# Altium PCB 6C-2L-1550um.PcbDoc
Units mm, origin at the board's own origin, x right, y up, seen from the top; angles counter-clockwise.
Board outline 96.52 x 44.45 mm, 2 copper layers (Top Layer, Bottom Layer), stack 1.586 mm thick; 62 components, 59 nets, 241 pads, 52 vias.
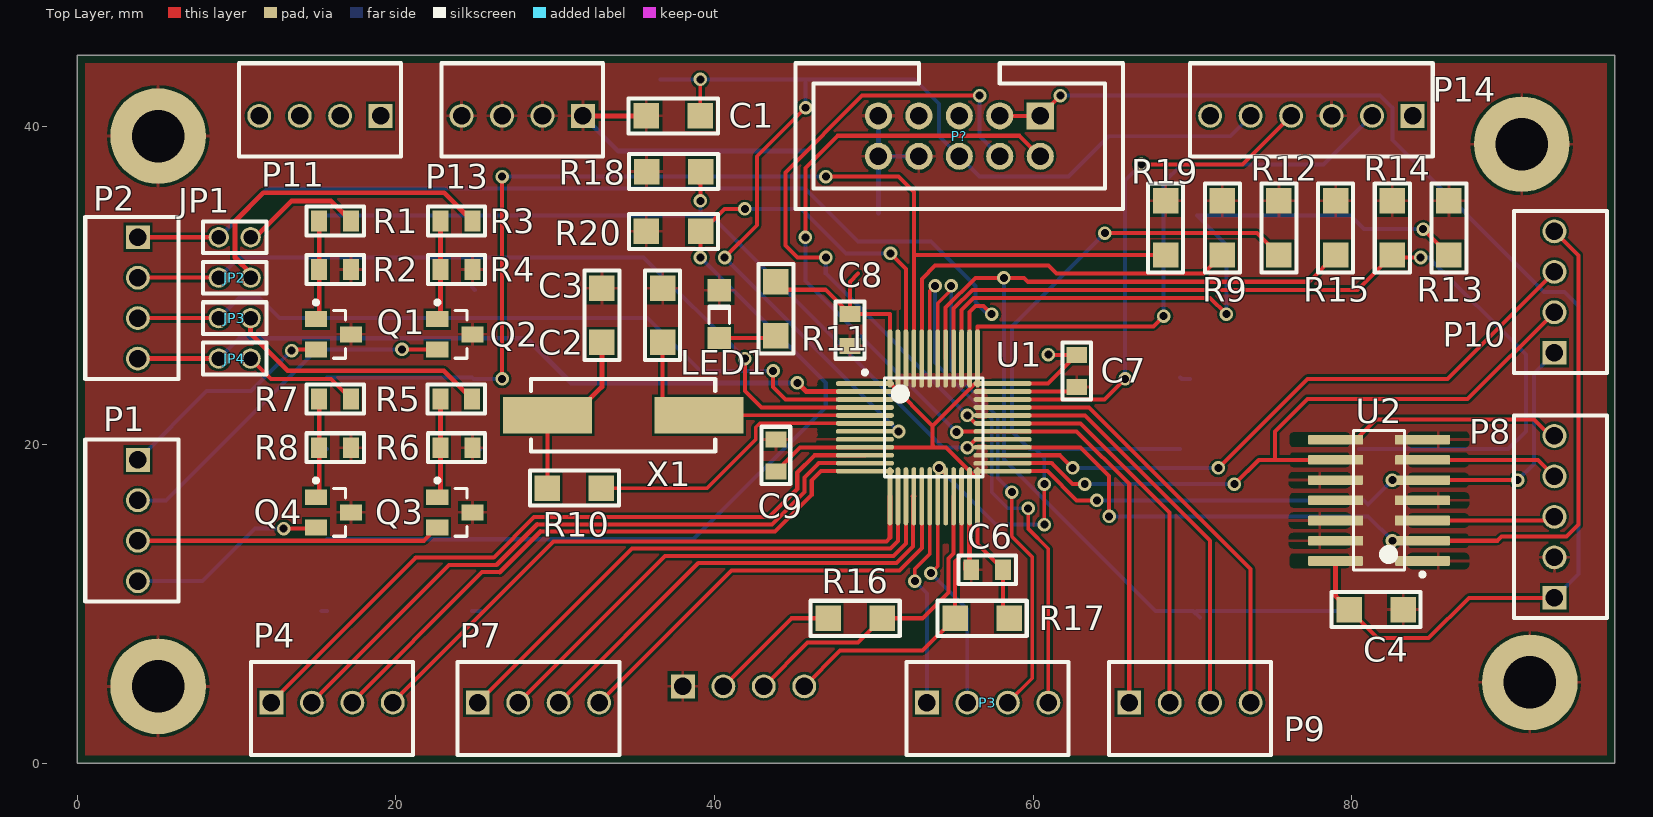
[diagram p0: Top Layer view]
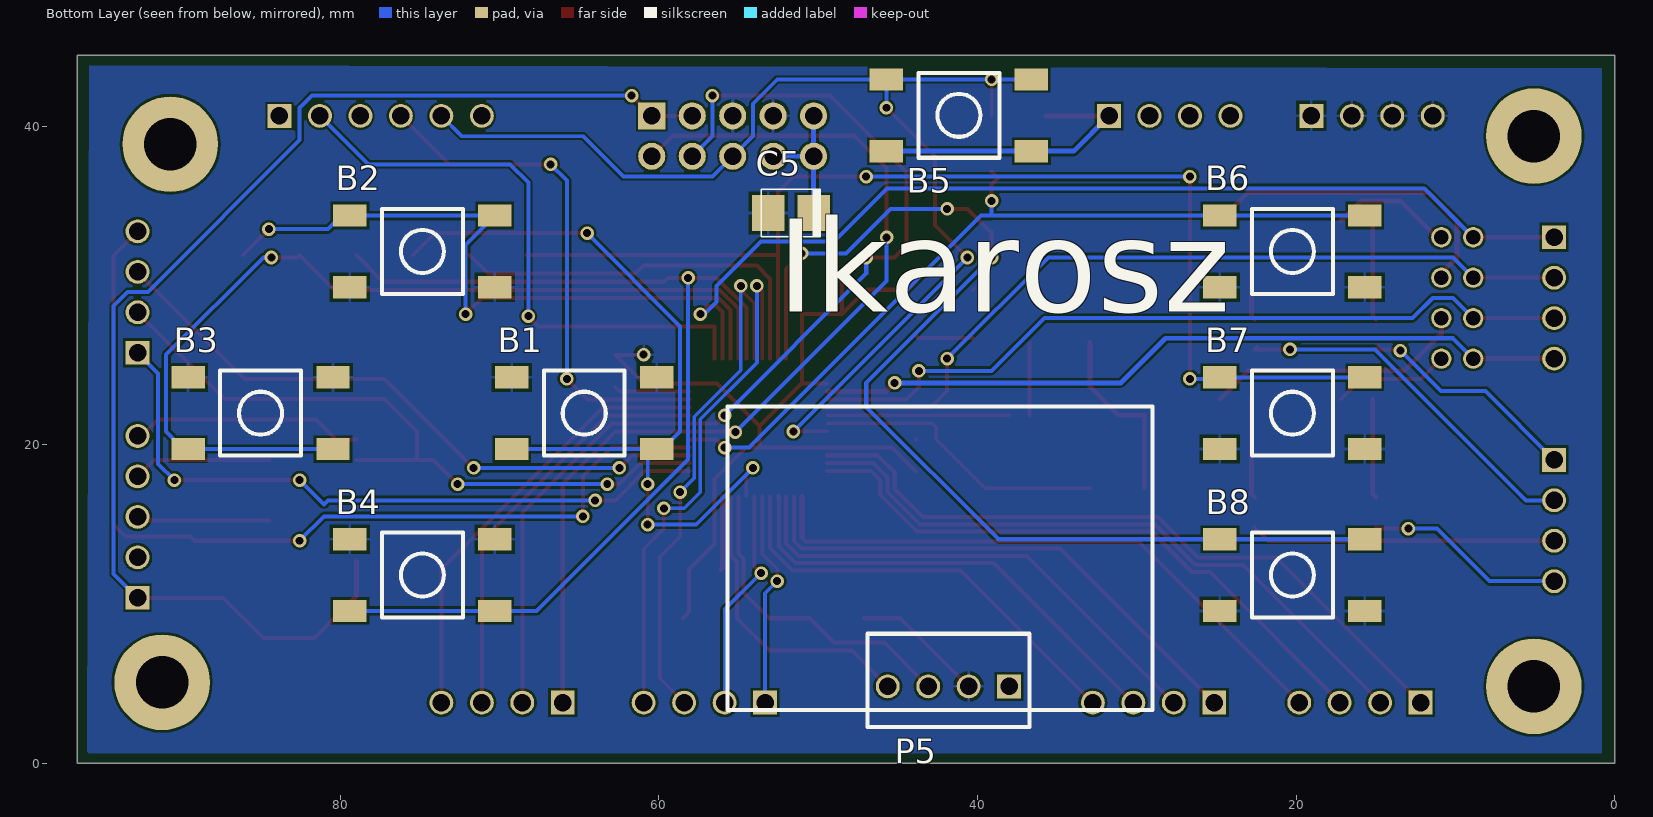
[diagram p1: Bottom Layer view, seen from below]
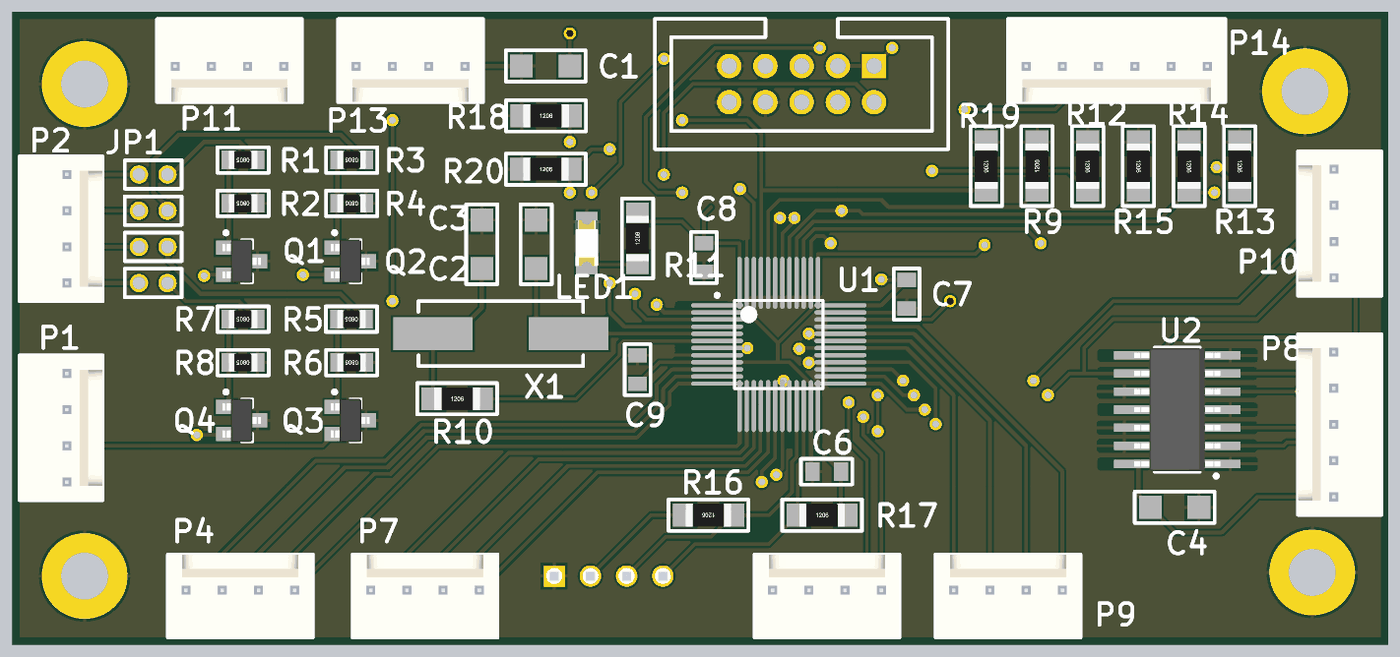
[diagram p2: 3D render of the assembled board from above, using the file's embedded part models]
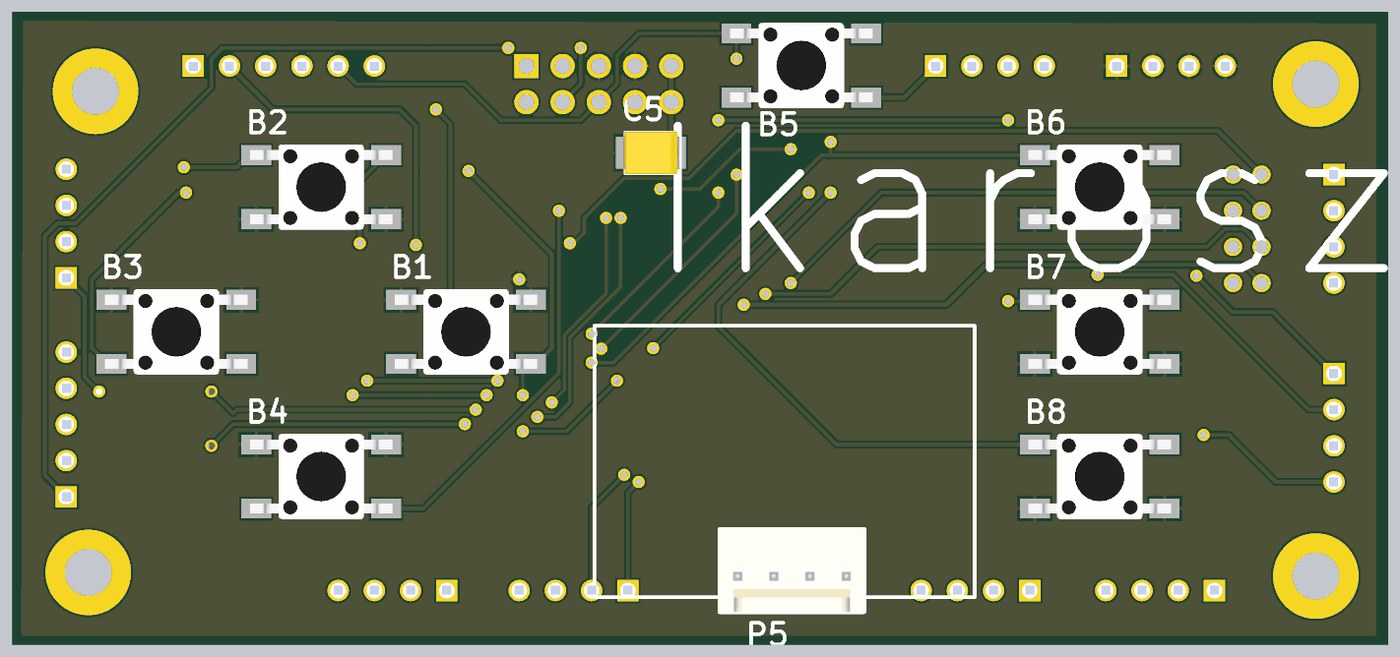
[diagram p3: 3D render of the assembled board from below, using the file's embedded part models]

## Layer stack, top to bottom
Top Solder: solder mask 0.0102, Solder Resist, Dk 3.5
Top Layer: signal copper 0.018
Dielectric1: core 1.55, FR-4, Dk 4.8
Bottom Layer: signal copper 0.018
Bottom Solder: solder mask 0.0102, Solder Resist, Dk 3.5

## Board outline
0,0 0,44.45 96.52,44.45 96.52,0

## Design rules (kind name [scope] priority, off if disabled: settings)
BoardOutlineClearance [All] p1: gap=0.25 ignorepadtopadclearanceinfootprint=FALSE except(0: Arc-SplitContinuation Track-SplitContinuation SMDPad-SplitContinuation THPad-SplitContinuation Via-SplitContinuation Fill-SplitContinuation Poly-SplitContinuation Region-SplitContinuation Text-SplitContinuation)
Clearance Clearance-xPP-xTP-xTT [All] p1: gap=0.15 ignorepadtopadclearanceinfootprint=FALSE except(0: Arc-Hole Track-Hole SMDPad-Hole THPad-Hole Via-Hole Fill-Hole Poly-Hole Region-Hole Text-Hole)
ComponentClearance [All] p1: gap=0.25 collisioncheckmode=3 verticalgap=0.25 showdistances=FALSE
DiffPairsRouting [All] p1: maxlimit=0.25 minlimit=0.25 mostfreqgap=0.25 toplayer_minwidth=0.381 toplayer_maxwidth=0.381 toplayer_prefwidth=0.381 bottomlayer_minwidth=0.381 bottomlayer_maxwidth=0.381 bottomlayer_prefwidth=0.381 maxuncoupledlength=12.5
Height [All] p1: minheight=0 maxheight=25 prefheight=12.5
HoleSize HoleSize-PTH [All] p1: absolutevalues=TRUE maxlimit=5 minlimit=0.25 maxpercent=80.000 minpercent=20.000
HoleToHoleClearance [All] p1: gap=0.35 allowstackedmicrovias=TRUE
MinimumAnnularRing "Minimum IAR  >0.45mm" [((ObjectKind = 'Pad') OR (ObjectKind = 'Via')) And (Layer = 'MultiLayer') And (HoleDiameter > AsMM(0.45))] p1: minimumring=0.175 // minimum inner annular ring for pads > 0.45mm finished hole size
MinimumAnnularRing "Minimum IAR <=0.45mm" [((ObjectKind = 'Pad') OR (ObjectKind = 'Via')) And (Layer = 'MultiLayer') And (HoleDiameter <= AsMM(0.45))] p2: minimumring=0.175 // minimum inner annular ring for pads <= 0.45mm finished hole size
MinimumSolderMaskSliver [All] p1: minsoldermaskwidth=0.08
PlaneClearance PlaneClearance-IPI [All] p1: clearance=0.25
PlaneConnect [All] p1: planeconnectstyle=Relief reliefexpansion=0.175 reliefentries=4 reliefconductorwidth=0.2 reliefairgap=0.2
PolygonConnect PolygonConnect-xTW [All] p1: connectstyle=Relief reliefconductorwidth=0.2 reliefentries=4 polygonreliefangle="90 Angle" airgapwidth=0.2
RoomDefinition main [InComponentClass('main')] p1: confinementstyle=ConfineIn formatcopy=TRUE lockcomponents=FALSE outline -17.145,-67.31 120.65,-67.31 120.65,74.93 -17.145,74.93
RoutingCorners [All] p1: cornerstyle=45-Degree minsetback=2.5 maxsetback=2.5
RoutingVias "RoutingVias > 0.45mm" [(ObjectKind = 'Via') And (HoleDiameter > AsMM(0.45))] p1: holewidth=0.5 width=0.85 viastyle="Through Hole" minholewidth=0.5 minwidth=0.85 maxholewidth=0.9 maxwidth=1.25 // finishet hole size > 0.45mm
RoutingVias "RoutingVias <= 0.45mm" [(ObjectKind = 'Via') And (HoleDiameter <= AsMM(0.45))] p2: holewidth=0.3 width=0.65 viastyle="Through Hole" minholewidth=0.25 minwidth=0.6 maxholewidth=0.45 maxwidth=0.8 // finishet hole size <= 0.45mm
SilkToSilkClearance [All] p1: silktosilkclearance=0.2
SilkToSolderMaskClearance SilkscreenOverComponentPads [IsPad] p1: minsilkscreentomaskgap=0.2 clearancetoexposedcopper=TRUE
SolderMaskExpansion [All] p1: expansion=0
UnRoutedNet [All] p1: checkbadconnections=TRUE
Width Width-xTW [All] p1: maxlimit=1.5 minlimit=0.15 preferedwidth=0.305 minimp=50.000000 maximp=50.000000 favimp=50.000000
18 further rules are at their usual default settings.

## Components (designator, comment, footprint, x,y, rotation, side; value= is the part's Value field where it differs from the comment)
B1 "Button" FP_BTN_SMD 64.69,21.975 r90 bottom
B2 "Button" FP_BTN_SMD 74.85,32.135 r270 bottom
B3 "Button" FP_BTN_SMD 85.01,21.975 r90 bottom
B4 "Button" FP_BTN_SMD 74.85,11.815 r90 bottom
B5 "Button" FP_BTN_SMD 41.17,40.676 r90 bottom
B6 "Button" FP_BTN_SMD 20.24,32.135 r270 bottom
B7 "Button" FP_BTN_SMD 20.24,21.975 r270 bottom
B8 "Button" FP_BTN_SMD 20.24,11.815 r270 bottom
C1 "100nF" FP_1206_CAP_125 37.416,40.64 r0 top
C2 "20pF" FP_1206_CAP_125 36.75,28.12 r270 top
C3 "20pF" FP_1206_CAP_125 32.94,28.12 r270 top
C4 "100nF" FP_1206_CAP_125 81.534,9.652 r180 top
C5 "4.7uF" FP_3528 51.717,34.544 r0 bottom
C6 "100nF" FP_0805_CAP_085 57.122,12.152 r0 top
C7 "100nF" FP_0805_CAP_085 62.738,24.622 r90 top
C8 "100nF" FP_0805_CAP_085 48.514,27.194 r90 top
C9 "100nF" FP_0805_CAP_085 43.862,19.324 r270 top
JP1 "JUMPER" FP_CONN2_TUSKE_2MM_1.5+3.2 9.89,33.02 r90 top
JP2 "JUMPER" FP_CONN2_TUSKE_2MM_1.5+3.2 9.89,30.48 r90 top
JP3 "JUMPER" FP_CONN2_TUSKE_2MM_1.5+3.2 9.89,27.94 r90 top
JP4 "JUMPER" FP_CONN2_TUSKE_2MM_1.5+3.2 9.89,25.4 r90 top
LED1 "150120RS75000" 1206_A 40.306,28.198 r270 top
P1 "Power" FP_CONN4_TAP_254MM 3.81,19.05 r180 top
P2 "IO" FP_CONN4_TAP_254MM 3.81,33.02 r180 top
P3 "IO" FP_CONN4_TAP_254MM 53.34,3.81 r270 top
P4 "Analog1" FP_CONN4_TAP_254MM 12.192,3.81 r270 top
P5 "0.96 LCD" FP_CONN4_TAP_254MM 38.02,4.83 r90 bottom
P7 "Analog/SPI" FP_CONN4_TAP_254MM 25.146,3.81 r270 top
P8 "MAX7219(szemek)" FP_CONN5_TAP_254MM 92.73,10.39 r0 top
P9 "Main debug" FP_CONN4_TAP_254MM 66.04,3.81 r270 top
P10 "SPI1" FP_CONN4_TAP_254MM 92.73,25.77 r0 top
P11 "3V3" FP_CONN4_TAP_254MM 19.05,40.64 r90 top
P13 "GND" FP_CONN4_TAP_254MM 31.75,40.64 r90 top
P14 "Programmer" FP_CONN6_TAP_254MM 83.82,40.64 r90 top
P? "HMI" FP_CONN10 60.452,40.64 r180 top
Q1 "FDN339AN" FAIR-SOT-3_V 16.092,26.928 r0 top
Q2 "FDN339AN" FAIR-SOT-3_V 23.712,26.928 r0 top
Q3 "FDN339AN" FAIR-SOT-3_V 23.712,15.752 r0 top
Q4 "FDN339AN" FAIR-SOT-3_V 16.092,15.752 r0 top
R1 "100" FP_0805_RES 16.192,34.04 r180 top
R2 "10k" FP_0805_RES 16.192,30.992 r180 top
R3 "100" FP_0805_RES 23.812,34.04 r180 top
R4 "10k" FP_0805_RES 23.812,30.992 r180 top
R5 "100" FP_0805_RES 23.796,22.864 r180 top
R6 "10k" FP_0805_RES 23.812,19.816 r180 top
R7 "100" FP_0805_RES 16.192,22.864 r180 top
R8 "10k" FP_0805_RES 16.192,19.816 r180 top
R9 "10k" FP_1206_RES 71.882,33.606 r90 top
R10 "390" FP_1206_RES 31.211,17.276 r0 top
R11 "1k" FP_1206_RES 43.862,28.53 r90 top
R12 "10k" FP_1206_RES 75.438,33.606 r270 top
R13 "10k" FP_1206_RES 86.106,33.606 r270 top
R14 "10k" FP_1206_RES 82.55,33.606 r270 top
R15 "10k" FP_1206_RES 78.994,33.606 r270 top
R16 "10k" FP_1206_RES 48.834,9.104 r180 top
R17 "10k" FP_1206_RES 56.806,9.104 r0 top
R18 "10k" FP_1206_RES 37.442,37.144 r0 top
R19 "10k" FP_1206_RES 68.326,33.606 r270 top
R20 "10k" FP_1206_RES 37.43,33.39 r0 top
U1 "STM32F030CCT6" STM-LQFP48_M 53.768,21.086 r0 top
U2 "SN74HCT125DT" D0014A_N 81.719,16.51 r180 top
X1 "8MHz" FP_CRYSTAL_HC49_SMD 39.036,21.848 r180 top

## Footprints (in the part's own frame and the unit in brackets; to place one, negate y for a bottom-side part, rotate by r counter-clockwise, add the part's x,y. Pads: shape width x height; smd on the part's side, far side on the other; paste and mask are expansions set on the pad)
1206_A [mm] "Chip LED, 2-Leads, Body 3.2x1.6mm, IPC Medium Density"
  rect 1.4x1.5 smd: 1(-1.5,0) 2(1.5,0)
  silkscreen extent -0.5,-0.66 0.6,0.65, body extent -1.6,-0.8 1.6,0.8, height 0.68
D0014A_N [mm] "SOIC, 14-Leads, Body 8.75x4mm, Pitch 1.27mm, IPC Medium Density"
  rrect17% 3.45x0.6 smd: 1(-2.725,3.81) 2(-2.725,2.54) 3(-2.725,1.27) 4(-2.725,0) 5(-2.725,-1.27) 6(-2.725,-2.54) 7(-2.725,-3.81) 8(2.725,-3.81) 9(2.725,-2.54) 10(2.725,-1.27) 11(2.725,0) 12(2.725,1.27) 13(2.725,2.54) 14(2.725,3.81)
  silkscreen extent -2.85,-4.38 1.6,4.78, body extent -3.02,-4.32 3.02,4.32, height 1.59
FAIR-SOT-3_V [mm] "SOT23, 3-Leads, Body 3.04x1.52mm, Pitch 0.95mm"
  rect 1.4x1 smd: 1(-1.1,0.95) 2(-1.1,-0.95) 3(1.1,0)
  silkscreen extent -1.22,-1.5 0.76,2.12, body extent -1.36,-1.52 1.36,1.52, height 1.12
FP_0805_CAP_085 [mm] "0805 kapacitás YAGEO 0.85mm magas"
  rect 1x1.3 smd: 1(-1,0) 2(1,0)
  silkscreen extent -1.8,-0.9 1.8,0.9, body extent -1,-0.64 1.03,0.64, height 0.85
FP_0805_RES [mm] "0805 ellenállás"
  rect 1x1.3 smd: 1(-1,0) 2(1,0)
  silkscreen extent -1.8,-0.9 1.8,0.9, body extent -1,-0.62 1,0.63, height 0.62
FP_1206_CAP_125 [mm] "1206 kapacitás 1.25 mm"
  rect 1.6x1.6 smd: 1(-1.7,0) 2(1.7,0)
  silkscreen extent -2.8,-1.1 2.8,1.1, body extent -1.52,-0.79 1.58,0.79, height 1.25
FP_1206_RES [mm] "1206 ellenállás"
  rect 1.6x1.6 smd: 1(-1.7,0) 2(1.7,0)
  silkscreen extent -2.8,-1.1 2.8,1.1, body extent -1.6,-0.8 1.6,0.8, height 0.62
FP_3528 [mm] "3528 TANTÁL SMD \"B\"-TOK"
  rect 2.05x2.25 smd: N(-1.425,0) P(1.425,0)
  silkscreen extent -1.85,-1.5 1.85,1.5, body extent -2.52,-1.5 2.48,1.5, height 2.11
FP_BTN_SMD [mm] "SMD Push Button 6x6mm"
  rect 1.4x2.1 smd: 1(2.25,4.55) 2(2.25,-4.55) 3(-2.25,4.55) 4(-2.25,-4.55)
  silkscreen extent -2.67,-2.54 2.67,2.54, body extent -3,-5 3,5, height 5.1
FP_CONN2_TUSKE_2MM_1.5+3.2 [mm] "2×1-es tüskesor, 2mm-es raszter, 1.5mm mûanyag + 3.2mm tüske SAMTEC-TMM-1XX-01-..."
  round 1.27 hole 0.9 mask+0: 1(0,-1) 2(0,1)
  silkscreen extent -1,-2 1,2, body extent -1,-2.02 1,1.92, height 4.7
FP_CONN4_TAP_254MM [mm] "álló két pólusú tápcsatlakozó 2.54mm"
  rect 1.5x1.5 hole 1.1: 1(0,0)
  round 1.5 hole 1.1: 2(0,2.54) 3(0,5.08) 4(0,7.62)
  silkscreen extent -2.54,-1.27 3.3,8.89, body extent -2.52,-1.27 3.28,8.89, height 11.56
FP_CONN5_TAP_254MM [mm] "álló öt pólusú tápcsatlakozó 2.54mm"
  rect 1.5x1.5 hole 1.1: 1(0,0)
  round 1.5 hole 1.1: 2(0,2.54) 3(0,5.08) 4(0,7.62) 5(0,10.16)
  silkscreen extent -2.54,-1.27 3.3,11.43, body extent -2.54,-1.27 3.26,11.43, height 11.56
FP_CONN6_TAP_254MM [mm] "álló hat pólusú tápcsatlakozó 2.54mm"
  rect 1.5x1.5 hole 1.1: 1(0,0)
  round 1.5 hole 1.1: 2(0,2.54) 3(0,5.08) 4(0,7.62) 5(0,10.16) 6(0,12.7)
  silkscreen extent -2.54,-1.27 3.3,13.97, body extent -2.52,-1.27 3.28,13.97, height 11.56
FP_CONN10 [mm]
  rect 1.7x1.7 hole 1.1: 1(0,0)
  round 1.7 hole 1.1: 2(0,2.54) 3(2.54,0) 4(2.54,2.54) 5(5.08,0) 6(5.08,2.54) 7(7.62,0) 8(7.62,2.54) 9(10.16,0) 10(10.16,2.54)
  silkscreen extent -5.21,-3.3 15.37,5.84
FP_CRYSTAL_HC49_SMD [mil] "HC49/SMD"
  rect 220x90 smd: 1(0,0) 2(375,0)
  silkscreen extent -40,-90 415,90, body extent -57,-90 432,90, height 130
STM-LQFP48_M [mm] "QFP, 48-Leads, Body 7x7mm, Pitch 0.5mm, IPC Low Density"
  oval 3.65x0.3 smd: 1(-4.325,2.75) 2(-4.325,2.25) 3(-4.325,1.75) 4(-4.325,1.25) 5(-4.325,0.75) 6(-4.325,0.25) 7(-4.325,-0.25) 8(-4.325,-0.75) 9(-4.325,-1.25) 10(-4.325,-1.75) 11(-4.325,-2.25) 12(-4.325,-2.75) 25(4.325,-2.75) 26(4.325,-2.25) 27(4.325,-1.75) 28(4.325,-1.25) 29(4.325,-0.75) 30(4.325,-0.25) 31(4.325,0.25) 32(4.325,0.75) 33(4.325,1.25) 34(4.325,1.75) 35(4.325,2.25) 36(4.325,2.75)
  oval 0.3x3.65 smd: 13(-2.75,-4.325) 14(-2.25,-4.325) 15(-1.75,-4.325) 16(-1.25,-4.325) 17(-0.75,-4.325) 18(-0.25,-4.325) 19(0.25,-4.325) 20(0.75,-4.325) 21(1.25,-4.325) 22(1.75,-4.325) 23(2.25,-4.325) 24(2.75,-4.325) 37(2.75,4.325) 38(2.25,4.325) 39(1.75,4.325) 40(1.25,4.325) 41(0.75,4.325) 42(0.25,4.325) 43(-0.25,4.325) 44(-0.75,4.325) 45(-1.25,4.325) 46(-1.75,4.325) 47(-2.25,4.325) 48(-2.75,4.325)
  silkscreen extent -4.45,-3.1 3.1,3.57, body extent -3.5,-3.5 3.5,3.5, height 1.6

## Part data
B1 B2 B3 B4 B5 B6 B7 B8: library part "Button 4P", "Push button"
C1 C2 C3 C4 C6 C7 C8 C9: library part CAP, "Capacitor"
C5: library part CAP_ELECT, "Polarized Capacitor"
JP1 JP2 JP3 JP4: "Jumper Wire"
LED1: library part CMP-1426-00013-1, "SMD mono-color Chip LED, WL-SMCW, Red", Color=Red, Manufacturer="Wuerth Elektronik", ComponentLink1Description="Manufacturer URL", ComponentLink1URL=http://www.we-online.com, ComponentLink2Description=Datasheet, ComponentLink2URL=http://katalog.we-online.com/led/datasheet/150120RS75000.pdf, PackageReference=1206_A, PartNumber=150120RS75000
P1 P2 P3 P4 P5 P7 P9 P10 P11 P13: library part Connector_4pin, "4pin Connector"
P8: library part Connector_5pin, "5pin Connector"
P14: library part Connector_6pin, "6pin connector"
P?: library part Connector_10pin, "10pin Connector"
Q1 Q2 Q3 Q4: library part CMP-2000-06252-1, "N-Channel Specified PowerTrench(R) MOSFET, 3 A, 20 V, -55 to 150 degC, 3-Pin SOT, RoHS, Tape and Reel", Manufacturer="Fairchild Semiconductor", Maximum Continuous Drain Current=3A, Maximum Drain Source Resistance=0.035?, Maximum Drain Source Voltage=20V, Maximum Gate Source Voltage=±8V, Maximum Operating Temperature=+150°C, Maximum Power Dissipation=0.5W, Minimum Gate Threshold Voltage=0.4V, Minimum Operating Temperature=-55°C, Package Description="3-Pin Small Outline Transistor, Body 2.92 x 1.4 mm, Pitch 0.95 mm", Package Reference=SOT-3, Package Type=SOT-23, Typical Input Capacitance @ Vds=700pF@10V, Category=PowerMOSFET, Channel Mode=Enhancement, Channel Type=N, Datasheet URL=https://www.fairchildsemi.com/datasheets/FD/FDN339AN.pdf, Datasheet Version=11/1999, Dimensions=2.92x1.4x0.94mm, Height=0.94mm, Length=2.92mm, Manufacturer URL=https://www.fairchildsemi.com/, Mounting Technology=SurfaceMount, Mounting Type=SurfaceMount, Number of Elements per Chip=1, Package URL=https://www.fairchildsemi.com/package-drawings/MA/MA03B.pdf, Pin Count=3, Transistor Configuration=Single, Transistor Material=Si, Typical Gate Charge @ Vgs=7nC@4.5V, Typical Turn-Off Delay Time=18ns, Typical Turn-On Delay Time=8ns, Width=1.4mm
R1 R2 R3 R4 R5 R6 R7 R8 R9 R10 R11 R12 R13 R14 R15 R16 R17 R18 R19 R20: library part RES, "Resistor"
U1: library part CMP-0304-00065-1, "ARM Cortex-M0 32-bit MCU, 256 KB Flash, 32 KB Internal RAM, 38 I/Os, 48-Pin LQFP, -40 to 85 degC, Tray", I/Os (High Current)=38, Operating Frequency(F) (Processor speed) (MHz)=48, Package Description="48-Pin Low Profile Quad Flat Package, Body 7 x 7 mm, Pitch 0.5 mm", Package Reference=LQFP48, Supply Voltage(Vcc) min (V)=2.4, ComponentLink1Description="Manufacturer URL", ComponentLink1URL=http://www.st.com/, ComponentLink2Description=Datasheet, ComponentLink2URL=http://www.st.com/st-web-ui/static/active/en/resource/technical/document/datasheet/DM00088500.pdf, Core="ARM Cortex-M0", DatasheetVersion="Rev. 2", FLASH Size (Prog) (kB)=256, Internal RAM Size (kB)=32, Mounting Technology="Surface Mount", Packing=Tray, PartId=1
U2: library part CMP-0440-00008-3, "Quadruple Bus Buffer Gates With 3-State Outputs, D0014A, SMALL T&R", F @ Nom Voltage(Max)(Mhz)=25, Generic Part Number=SN74HCT125, ICC @ Nom Voltage(Max)(mA)=0.08, Manufacturer="Texas Instruments", Operating Temperature Range(C)="-40 to 85", Rating=Catalog, tpd @ Nom Voltage(Max)(ns)=30, Voltage(Nom)(V)=5, Bits(#)=4, Code_JEDEC=MS-012, DatasheetVersion=SCLS069E, Input Type=TTL, Output Type=CMOS, PackageReference=D0014A, PackageVersion=http://www.ti.com/lit/ml/mpds177g/mpds177g.pdf, PartId=1, VCC(Max)(V)=5.5, VCC(Min)(V)=4.5
X1: library part Crystal, "Quarz Crystal"

## Free pads (board coordinates)
  round 6 hole 3.3: 9(5.08,39.37) 10(5.08,4.826) 11(90.678,38.862) 12(91.186,5.08)

## Via types
v1: diameter 0.85, hole 0.5, Top Layer to Bottom Layer, 52 vias

## Nets (pads, with @x,y where several pads share a name; then routed paths per layer and width w, separated by ;. In a path a pad name is that pad's centre, name@x,y a point inside that pad or via, vN(x,y) a via of type N, cw(c..) or ccw(c..) an arc to the next point about the centre after c; other vN are vias at no path point)
3V3: B1.1 B1.2 B2.1 B2.2 B3.1 B3.2 B4.1 B4.2 B6.1 B6.2 B7.1 B7.2 B8.1 B8.2 C5.P C6.2 C7.2 C8.2 C9.2 P5.2 P11.1 P11.2 P11.3 P11.4 P?.5 P?.7 R11.2 R16.2 R17.2 U1.1 U1.9 U1.24 U1.36 U1.48 | length 70.1
  Top Layer w0.254: P5.2 44.834,9.104 R16.2 ; R11.2 44.366,29.726 46.982,29.726 C8.2 ; C9.2@43.894,18.324 C9.2 45.374,19.836 U1.9 53.824,19.836 ; 49.022,30.734 48.514,30.226 C8.2 ; U1.1 U1.48@51.042,23.836 ; R17.2 58.122,9.488 C6.2 56.518,13.756 U1.24 56.518,17.852 54.534,19.836 ; v1(60.96,25.654) 60.992,25.622 C7.2 60.952,23.836 U1.36 56.348,23.836 53.695,21.183 ; C8.2 51.018,28.194 U1.48 51.018,23.86 U1.48@51.042,23.836 ; U1.48@51.042,23.836 53.695,21.183 ; 53.695,21.183 53.695,19.965 53.824,19.836 ; 53.824,19.836 54.534,19.836 ; 53.824,19.836 54.534,19.836
  Bottom Layer w0.254: B7.1@15.153,19.725 B7.1 ; B8.1@15.327,9.565 B8.1 ; B8.2 B8.2@25.313,9.565 ; B7.2 B7.2@25.313,19.725 ; B6.2 B6.2@24.957,29.718 ; B1.1 69.335,24.13 B1.1@69.85,24.13
5V: C4.2 P8.1 P?.1 P?.3 U2.14 | length 80.5
  Top Layer w0.254: P?.3 P?.1 v1(61.722,41.91) ; C4.2 81.612,7.874 84.836,7.874 87.352,10.39 P8.1
  Top Layer w0.305: U2.14 78.994,10.492 C4.2
  Bottom Layer w0.254: v1(61.722,41.91) 81.788,41.91 82.55,41.148 82.55,39.116 92.075,29.591 93.345,29.591 94.234,28.702 94.234,11.894 P8.1
GND: B5.3 B5.4 C1.1 C2.1 C3.1 C4.1 C5.N C6.1 C7.1 C8.1 C9.1 LED1.1 P5.1 P8.2 P13.1 P13.2 P13.3 P13.4 P14.3 P?.8 P?.9 P?.10 pad.9 pad.10 pad.11 pad.12 Q1.3 Q2.3 Q3.3 Q4.3 R2.1 R4.1 R6.1 R8.1 R9.2 R12.1 R13.1 R14.1 R15.1 R18.1 R19.1 R20.1 U1.8 U1.23 U1.35 U1.47 U2.1 U2.4 U2.7 U2.10 U2.12 U2.13 | length 37.8
  Top Layer w0.229: LED1.1@40.184,29.82 LED1.1 ; C9.1 C9.1@43.874,20.336 ; C6.1@55.708,12.196 C6.1@55.708,12.612 ; U1.35@58.1,23.343 U1.35 62.452,23.336 C7.1 ; P8.2@92.5,12.7 P8.2
  Top Layer w0.305: P13.1 C1.1 ; U1.23 56.018,12.256 C6.1
  Bottom Layer w0.305: P13.1 33.964,38.426 B5.4 B5.3 ; C5.N P?.10 ; P?.9 P?.10 ; P?.8 P?.10
HMI_RX: P9.1 P?.2 U1.30 | length 62.7
  Top Layer w0.254: v1(45.708,33.008) 45.708,37.37 47.728,39.39 59.162,39.39 P?.2 ; v1(55.202,20.788) 55.154,20.836 U1.30 62.73,20.836 66.04,17.526 P9.1
  Bottom Layer w0.254: v1(45.708,33.008) 45.708,30.282 v1(55.202,20.788)
HMI_TX: P9.2 P?.4 U1.31 | length 66.7
  Top Layer w0.254: v1(46.99,31.75) 45.212,31.75 44.45,32.512 44.45,37.084 49.276,41.91 v1(56.642,41.91) ; v1(55.88,21.844) 56.388,21.336 U1.31 62.992,21.336 68.58,15.748 P9.2
  Bottom Layer w0.254: v1(46.99,31.75) 46.99,30.734 v1(55.88,21.844) ; v1(56.642,41.91) 56.642,39.37 P?.4
I2C1_SCL: P5.3 R16.1 U1.21 | length 20.2
  Top Layer w0.254: P5.3 45.85,7.58 49.01,7.58 R16.1 53.074,9.104 54.702,10.732 54.702,12.845 55.018,13.161 U1.21
I2C1_SDA: P5.4 R17.1 U1.22 | length 19.1
  Top Layer w0.254: P5.4 47.882,7.072 53.074,7.072 R17.1 55.106,12.66 55.345,12.899 55.345,12.917 55.518,13.09 U1.22
NetB1_3: B1.3 B1.4 R12.2 U1.20 | length 52.4
  Top Layer w0.229: v1(54.102,18.542) 54.518,18.126 U1.20 ; v1(60.706,14.986) v1(60.706,17.526)
  Top Layer w0.254: v1(64.516,33.274) 74.07,33.274 R12.2
  Bottom Layer w0.229: v1(54.102,18.542) 57.658,14.986 v1(60.706,14.986) ; v1(60.706,17.526) 60.706,19.159 B1.4 B1.3
  Bottom Layer w0.254: B1.4 59.777,19.725 58.674,20.828 58.674,27.432 v1(64.516,33.274)
NetB2_3: B2.3 B2.4 R13.2 U1.39 | length 44.2
  Top Layer w0.254: U1.39 55.518,28.467 56.261,29.21 71.12,29.21 v1(72.136,28.194) ; v1(84.484,33.528) R13.2
  Bottom Layer w0.254: v1(72.136,28.194) 72.136,32.549 B2.3 B2.4 79.915,34.385 80.772,33.528 v1(84.484,33.528)
NetB3_3: B3.3 B3.4 R14.2 U1.40 | length 58.8
  Top Layer w0.254: U1.40 55.018,28.539 56.197,29.718 80.362,29.718 R14.2 82.706,31.75 v1(84.328,31.75)
  Bottom Layer w0.229: B3.4 B3.3
  Bottom Layer w0.254: v1(84.328,31.75) 84.836,31.75 90.932,25.654 90.932,20.828 89.829,19.725 B3.3
NetB4_3: B4.3 B4.4 R15.2 U1.41 | length 66.2
  Top Layer w0.254: U1.41 54.518,28.61 56.38,30.472 v1(58.174,30.472) 59.444,30.472 59.69,30.226 77.314,30.226 R15.2
  Bottom Layer w0.254: v1(58.174,30.472) 58.174,19.065 67.674,9.565 70.046,9.565 B4.4@70.467,9.144 ; B4.4 B4.3
NetB6_3: B6.3 B6.4 R18.2 U1.29 | length 51.8
  Top Layer w0.254: v1(39.116,35.306) 39.116,36.346 38.73,36.732 R18.2 ; v1(55.88,19.812) 56.404,20.336 U1.29
  Bottom Layer w0.254: B6.3 B6.4 39.116,34.385 ; v1(39.116,35.306) 39.116,34.385 ; 39.142,34.411 39.116,34.385 ; v1(55.88,19.812) 54.356,19.812 39.783,34.385 39.116,34.385
NetB7_3: B7.3 B7.4 R19.2 U1.45 | length 76.3
  Top Layer w0.254: v1(26.67,24.13) v1(26.67,36.83) ; v1(46.99,36.83) 51.562,36.83 52.536,35.856 52.536,32.004 ; U1.45 52.536,25.429 52.536,32.004 ; R19.2 52.634,31.906 52.536,32.004
  Bottom Layer w0.254: B7.3 B7.4 24.885,24.13 v1(26.67,24.13) ; v1(26.67,36.83) v1(46.99,36.83)
NetB8_3: B8.3 B8.4 R20.2 U1.46 | length 69.7
  Top Layer w0.254: v1(39.116,31.75) 39.116,33.376 R20.2 39.232,33.39 40.64,34.798 v1(41.91,34.798) ; v1(51.054,32.004) 52.018,31.04 U1.46
  Bottom Layer w0.254: B8.3 B8.4 38.703,14.065 46.99,22.352 46.99,23.876 v1(39.116,31.75) ; v1(41.91,34.798) 45.466,34.798 48.26,32.004 v1(51.054,32.004)
NetC2_2: C2.2 U1.5 X1.1 | length 16
  Top Layer w0.229: X1.1@38.02,21.848 X1.1 39.048,21.836 U1.5
  Top Layer w0.254: X1.1@36.75,21.848 C2.2
NetC3_2: C3.2 R10.1 X1.2 | length 11.5
  Top Layer w0.254: R10.1 X1.2
  Top Layer w0.305: X1.2 31.162,21.848 32.94,23.626 C3.2
NetJP1_1: JP1.1 R1.1 | length 7.8
  Top Layer w0.305: JP1.1 11.176,33.02 13.462,35.306 15.926,35.306 R1.1
NetJP1_2: JP1.2 P2.1 U1.38 | length 63.4
  Top Layer w0.254: P2.1 JP1.2 ; U1.38 56.018,28.332 56.388,28.702 56.896,28.702 v1(57.404,28.194)
  Bottom Layer w0.254: JP1.2 11.962,36.092 45.696,36.092 49.022,32.766 53.594,32.766 56.388,29.972 56.388,28.956 57.15,28.194 v1(57.404,28.194)
NetJP2_1: JP2.1 R3.1 | length 20.3
  Top Layer w0.305: JP2.1 10.89,30.766 9.906,31.75 9.906,34.036 11.684,35.814 23.038,35.814 R3.1
NetJP2_2: JP2.2 P2.2 U1.4 | length 51.2
  Top Layer w0.254: P2.2 JP2.2 ; v1(41.91,25.4) 41.91,23.368 42.942,22.336 U1.4
  Bottom Layer w0.254: JP2.2 10.16,31.75 35.56,31.75 v1(41.91,25.4)
NetJP3_1: JP3.1 R5.1 | length 16.6
  Top Layer w0.305: JP3.1 10.89,26.956 13.208,24.638 23.022,24.638 R5.1
NetJP3_2: JP3.2 P2.3 U1.3 | length 49.4
  Top Layer w0.254: P2.3 JP3.2 ; v1(43.688,24.638) 43.688,23.622 44.474,22.836 U1.3
  Bottom Layer w0.254: JP3.2 10.16,29.21 11.43,29.21 12.7,27.94 35.814,27.94 39.116,24.638 v1(43.688,24.638)
NetJP4_1: JP4.1 R7.1 | length 7.4
  Top Layer w0.254: JP4.1 12.16,24.13 15.926,24.13 R7.1
NetJP4_2: JP4.2 P2.4 U1.2 | length 47.5
  Top Layer w0.305: P2.4 JP4.2 ; v1(45.212,23.876) 45.752,23.336 U1.2
  Bottom Layer w0.254: JP4.2 10.17,26.68 28.197,26.68 28.207,26.67
  Bottom Layer w0.305: 28.207,26.67 31.001,23.876 v1(45.212,23.876)
NetLED1_2: LED1.2 R11.1 | length 3.6
  Top Layer w0.229: LED1.2 43.73,26.698 R11.1
NetP1_1: P1.1 Q1.2 | length 14.3
  Top Layer w0.254: v1(13.462,25.908) 13.532,25.978 Q1.2 Q1.2@14.848,26.122
  Bottom Layer w0.254: P1.1 8.128,23.368 10.922,23.368 v1(13.462,25.908)
NetP1_2: P1.2 Q2.2 | length 22.9
  Top Layer w0.254: v1(20.39,25.978) Q2.2 Q2.2@22.468,26.122
  Bottom Layer w0.254: P1.2 5.588,16.51 15.056,25.978 v1(20.39,25.978)
NetP1_3: P1.3 Q3.2 | length 19.1
  Top Layer w0.254: P1.3 21.78,13.97 Q3.2
NetP1_4: P1.4 Q4.2 | length 12.6
  Top Layer w0.254: v1(12.954,14.732) 14.922,14.732 Q4.2
  Bottom Layer w0.254: P1.4 7.874,11.43 11.176,14.732 v1(12.954,14.732)
NetP3_1: P3.1 U1.18 | length 13.7
  Top Layer w0.229: v1(52.578,11.43) 52.578,12.192 53.518,13.132 U1.18
  Bottom Layer w0.229: v1(52.578,11.43) 53.34,10.668 P3.1
NetP3_2: P3.2 U1.19 | length 14.1
  Top Layer w0.229: v1(53.594,11.938) 54.018,12.362 U1.19
  Bottom Layer w0.229: v1(53.594,11.938) 55.88,9.652 P3.2
NetP3_3: P3.3 U1.42 | length 33.8
  Top Layer w0.229: U1.42 54.018,28.872 54.864,29.718 v1(54.864,29.972) ; P3.3 59.944,5.334 59.944,12.954 58.674,14.224 v1(58.674,17.018)
  Bottom Layer w0.229: v1(54.864,29.972) 54.864,24.665 57.783,21.747 57.783,17.909 v1(58.674,17.018)
NetP3_4: P3.4 U1.43 | length 34.5
  Top Layer w0.229: U1.43 53.518,29.642 v1(53.848,29.972) ; v1(59.69,16.002) 59.69,14.732 60.96,13.462 P3.4
  Bottom Layer w0.229: v1(53.848,29.972) 53.848,25.146 57.404,21.59 57.404,17.018 58.42,16.002 v1(59.69,16.002)
NetP4_1: P4.1 U1.10 | length 44.6
  Top Layer w0.254: P4.1@11.917,3.577 21.254,12.914 26.15,12.914 28.69,15.454 43.422,15.454 45.2,17.232 45.2,18.248 46.288,19.336 U1.10
NetP4_2: P4.2 U1.11 | length 42.1
  Top Layer w0.254: P4.2@14.27,3.39 23.339,12.459 26.338,12.459 ; 28.878,14.999 43.61,14.999 45.655,17.044 45.655,17.941 46.55,18.836 U1.11
  Top Layer w0.305: 26.338,12.459 28.878,14.999
NetP4_3: P4.3 U1.12 | length 39.3
  Top Layer w0.254: P4.3@16.81,3.39 25.424,12.004 26.527,12.004 ; 29.067,14.544 43.799,14.544 46.11,16.855 46.11,17.752 46.693,18.336 U1.12
  Top Layer w0.305: 26.527,12.004 29.067,14.544
NetP4_4: P4.4 U1.13 | length 38.7
  Top Layer w0.254: P4.4@19.35,3.39 29.89,13.93 50.788,13.93 51.018,14.16
  Top Layer w0.305: 51.018,14.16 U1.13
NetP7_1: P7.1 U1.14 | length 34
  Top Layer w0.254: P7.1@24.73,3.39 34.815,13.475 51.047,13.475 51.518,13.946 U1.14
NetP7_2: P7.2 U1.15 | length 32
  Top Layer w0.254: P7.2@27.27,3.39 36.9,13.02 51.235,13.02 52.018,13.803 U1.15
NetP7_3: P7.3 U1.16 | length 30.1
  Top Layer w0.254: P7.3@29.81,3.39 38.986,12.566 51.424,12.566 52.473,13.615 U1.16@52.473,16.761
  Top Layer w0.305: U1.16@52.473,16.761 U1.16
NetP7_4: P7.4 U1.17 | length 28.1
  Top Layer w0.254: P7.4@32.35,3.39 41.071,12.111 51.612,12.111 53.018,13.517 U1.17
NetP8_3: P8.3 U2.3 | length 8.4
  Top Layer w0.254: U2.3 92.5,15.24 P8.3
NetP8_4: P8.4 U2.6 | length 8.7
  Top Layer w0.254: U2.6 91.69,19.05 P8.4
NetP8_5: P8.5 U2.8 | length 14.7
  Top Layer w0.254: U2.8 80.264,20.32 81.534,21.59 91.44,21.59 92.48,20.55 P8.5
NetP10_3: P10.3 U1.27 | length 40.1
  Top Layer w0.254: U1.27 61.69,19.336 v1(62.484,18.542) ; v1(71.628,18.542) 77.216,24.13 86.01,24.13 P10.3
  Bottom Layer w0.254: v1(62.484,18.542) v1(71.628,18.542)
NetP14_2: P14.2 U1.37 | length 37.2
  Top Layer w0.254: U1.37 56.518,27.432 67.564,27.432 v1(68.202,28.07)
  Bottom Layer w0.254: v1(68.202,28.07) 68.202,36.452 69.342,37.592 78.232,37.592 P14.2
NetP14_4: P14.4 U1.34 | length 32.8
  Top Layer w0.254: U1.34 64.492,22.836 v1(65.786,24.13) ; v1(66.802,37.592) 73.152,37.592 P14.4
  Bottom Layer w0.254: v1(65.786,24.13) 65.786,36.576 v1(66.802,37.592)
NetQ1_1: Q1.1 R1.2 R2.2 | length 6.2
  Top Layer w0.305: Q1.1 15.192,28.078 R2.2 R1.2
NetQ2_1: Q2.1 R3.2 R4.2 | length 6.2
  Top Layer w0.305: Q2.1 22.812,28.078 R4.2 R3.2
NetQ3_1: Q3.1 R5.2 R6.2 | length 6.3
  Top Layer w0.305: Q3.1 22.812,16.902 R6.2 22.812,22.848 R5.2
NetQ4_1: Q4.1 R7.2 R8.2 | length 6.2
  Top Layer w0.305: Q4.1 15.192,16.902 R8.2 R7.2
NetR9_1: R9.1 U1.44 | length 24.9
  Top Layer w0.254: U1.44 53.018,30.412 53.848,31.242 60.96,31.242 61.468,30.734 70.71,30.734 R9.1
NetR10_2: R10.2 U1.6 | length 18.7
  Top Layer w0.229: R10.2 39.544,17.276 42.592,20.324 42.592,21.086 42.842,21.336 U1.6
RESET: B5.1 B5.2 C1.2 P14.5 P?.6 U1.7 | length 75.5
  Top Layer w0.229: C1.2 v1(39.116,42.926) ; v1(40.64,31.75) 42.672,33.782 42.672,38.1 v1(45.72,41.148) ; U1.7 51.554,20.836 v1(51.562,20.828)
  Bottom Layer w0.229: B5.2 v1(39.116,42.926) B5.1 ; v1(40.64,31.75) v1(51.562,20.828) ; v1(45.72,41.148) B5.1 ; P14.5 72.39,39.37 64.77,39.37 62.23,36.83 56.642,36.83 P?.6 54.102,39.37 54.102,41.402 52.578,42.926 B5.1
SPI1_MOSI: P10.4 U1.28 U2.2 | length 59.5
  Top Layer w0.254: U1.28 62.968,19.836 64.77,18.034 v1(64.77,15.494) ; v1(82.55,13.97) U2.2 89.154,13.97 89.408,14.224 93.472,14.224 94.234,14.986 94.234,31.886 P10.4
  Bottom Layer w0.254: v1(64.77,15.494) 81.026,15.494 v1(82.55,13.97)
SPI1_NSS: P10.1 U1.25 U2.5 | length 42.8
  Top Layer w0.254: U1.25 60.912,18.336 62.738,16.51 v1(64.008,16.51) ; v1(82.55,17.78) U2.5 v1(90.424,17.78)
  Bottom Layer w0.254: v1(64.008,16.51) 80.772,16.51 81.026,16.256 v1(82.55,17.78) ; v1(90.424,17.78) 91.44,18.796 91.44,24.48 P10.1
SPI1_SCK: P10.2 U1.26 U2.9 | length 44.5
  Top Layer w0.254: U1.26 61.174,18.836 62.484,17.526 v1(63.246,17.526) ; v1(72.644,17.526) 74.168,19.05 75.184,19.05 ; U2.9 75.184,19.05 ; P10.2 87.28,22.86 77.216,22.86 75.184,20.828 75.184,19.05
  Bottom Layer w0.254: v1(63.246,17.526) v1(72.644,17.526)
USART1_CTS: P9.3 U1.32 | length 26.4
  Top Layer w0.254: U1.32 63.254,21.836 71.12,13.97 P9.3
USART1_RTS: P9.4 U1.33 | length 28.2
  Top Layer w0.254: U1.33 63.516,22.336 73.66,12.192 P9.4
pads on no net: P14.1 P14.6 U2.11

## Polygon pours and split planes (outlines as drawn)
3V3 on Bottom Layer "Top Layer-No Net" (solid, remove dead copper, pour order 0): 0.826,43.624 0.826,0.635 95.885,0.635 95.758,43.815
GND on Top Layer "Top Layer-No Net" (solid, remove dead copper, pour order 2): 0.508,43.942 0.508,0.508 96.012,0.508 96.012,43.942

## Silkscreen, mask and mechanical layers (free items; w line width, h text height)
Bottom Overlay:
  lines w0.254: 29.015,3.346 29.015,22.396 55.685,22.396 55.685,3.346 29.015,3.346
  text "Ikarosz" at 52.578,26.416 h10
Mechanical 1:
  the board outline again, w0.508